# EAGLE board LEDS (EAGLE 6.4)
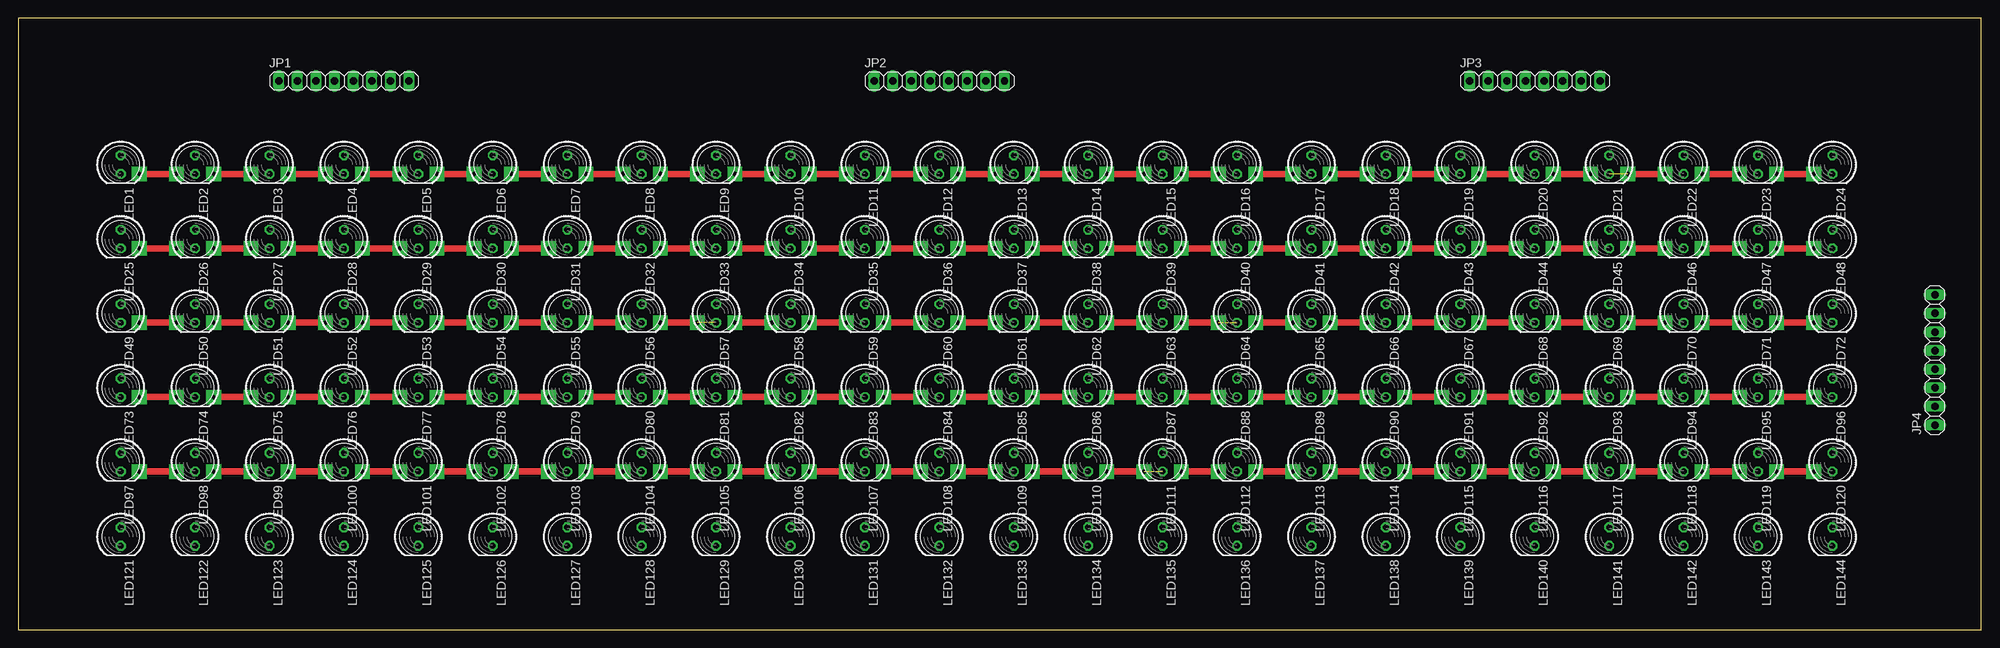
[diagram p0: board, top side]
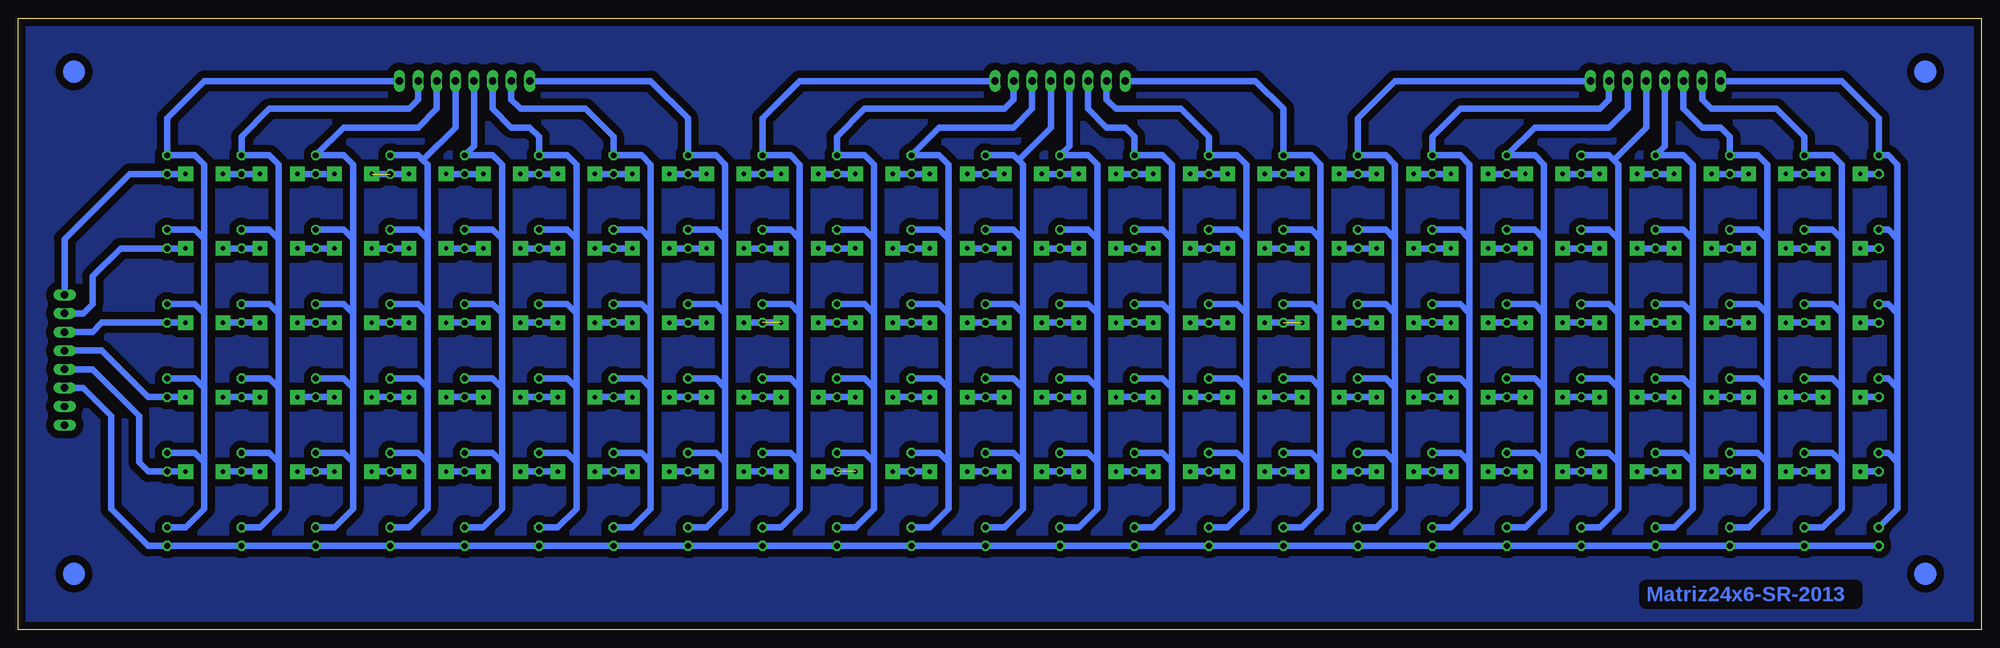
[diagram p1: board, bottom side, seen from below]

Size 267.95 x 83.49 mm. Coordinates in mm from the lower left corner, seen from the top.
Outline: 0,0 267.95,0 267.95,83.49 0,83.49 0,0
Copper layers (1*16): Top 0.035mm / dielectric 1.5mm / Bottom 0.035mm
Design rules "default *": minimum track width 10mil, minimum drill 24mil, track to track 8mil, track to pad 8mil, pad to pad 8mil, via to via 8mil, smd to smd 8mil, copper to edge 40mil, drill to drill 8mil, minimum pad ring 10mil, minimum via ring 8mil, stop-mask expansion 4mil, vias tented up to drill 0mil, thermal gap 10mil

## Footprints (pad centres in the part's own frame; a part is rotated, then mirrored left to right if it is on the bottom)
1X08 = drill 1.016 long: 1 -8.89,0; 2 -6.35,0; 3 -3.81,0; 4 -1.27,0; 5 1.27,0; 6 3.81,0; 7 6.35,0; 8 8.89,0
LED5MM = drill 0.813 octagon: A -1.27,0; K 1.27,0

## Placement (x,y rotation side)
JP1  [1X08]  44.45,74.93 0 top
JP2  [1X08]  125.73,74.93 0 top
JP3  [1X08]  207.01,74.93 0 top
JP4  [1X08]  261.62,36.83 90 top
LED1  [LED5MM]  13.97,63.5 270 top
LED2  [LED5MM]  24.13,63.5 270 top
LED3  [LED5MM]  34.29,63.5 270 top
LED4  [LED5MM]  44.45,63.5 270 top
LED5  [LED5MM]  54.61,63.5 270 top
LED6  [LED5MM]  64.77,63.5 270 top
LED7  [LED5MM]  74.93,63.5 270 top
LED8  [LED5MM]  85.09,63.5 270 top
LED9  [LED5MM]  95.25,63.5 270 top
LED10  [LED5MM]  105.41,63.5 270 top
LED11  [LED5MM]  115.57,63.5 270 top
LED12  [LED5MM]  125.73,63.5 270 top
LED13  [LED5MM]  135.89,63.5 270 top
LED14  [LED5MM]  146.05,63.5 270 top
LED15  [LED5MM]  156.21,63.5 270 top
LED16  [LED5MM]  166.37,63.5 270 top
LED17  [LED5MM]  176.53,63.5 270 top
LED18  [LED5MM]  186.69,63.5 270 top
LED19  [LED5MM]  196.85,63.5 270 top
LED20  [LED5MM]  207.01,63.5 270 top
LED21  [LED5MM]  217.17,63.5 270 top
LED22  [LED5MM]  227.33,63.5 270 top
LED23  [LED5MM]  237.49,63.5 270 top
LED24  [LED5MM]  247.65,63.5 270 top
LED25  [LED5MM]  13.97,53.34 270 top
LED26  [LED5MM]  24.13,53.34 270 top
LED27  [LED5MM]  34.29,53.34 270 top
LED28  [LED5MM]  44.45,53.34 270 top
LED29  [LED5MM]  54.61,53.34 270 top
LED30  [LED5MM]  64.77,53.34 270 top
LED31  [LED5MM]  74.93,53.34 270 top
LED32  [LED5MM]  85.09,53.34 270 top
LED33  [LED5MM]  95.25,53.34 270 top
LED34  [LED5MM]  105.41,53.34 270 top
LED35  [LED5MM]  115.57,53.34 270 top
LED36  [LED5MM]  125.73,53.34 270 top
LED37  [LED5MM]  135.89,53.34 270 top
LED38  [LED5MM]  146.05,53.34 270 top
LED39  [LED5MM]  156.21,53.34 270 top
LED40  [LED5MM]  166.37,53.34 270 top
LED41  [LED5MM]  176.53,53.34 270 top
LED42  [LED5MM]  186.69,53.34 270 top
LED43  [LED5MM]  196.85,53.34 270 top
LED44  [LED5MM]  207.01,53.34 270 top
LED45  [LED5MM]  217.17,53.34 270 top
LED46  [LED5MM]  227.33,53.34 270 top
LED47  [LED5MM]  237.49,53.34 270 top
LED48  [LED5MM]  247.65,53.34 270 top
LED49  [LED5MM]  13.97,43.18 270 top
LED50  [LED5MM]  24.13,43.18 270 top
LED51  [LED5MM]  34.29,43.18 270 top
LED52  [LED5MM]  44.45,43.18 270 top
LED53  [LED5MM]  54.61,43.18 270 top
LED54  [LED5MM]  64.77,43.18 270 top
LED55  [LED5MM]  74.93,43.18 270 top
LED56  [LED5MM]  85.09,43.18 270 top
LED57  [LED5MM]  95.25,43.18 270 top
LED58  [LED5MM]  105.41,43.18 270 top
LED59  [LED5MM]  115.57,43.18 270 top
LED60  [LED5MM]  125.73,43.18 270 top
LED61  [LED5MM]  135.89,43.18 270 top
LED62  [LED5MM]  146.05,43.18 270 top
LED63  [LED5MM]  156.21,43.18 270 top
LED64  [LED5MM]  166.37,43.18 270 top
LED65  [LED5MM]  176.53,43.18 270 top
LED66  [LED5MM]  186.69,43.18 270 top
LED67  [LED5MM]  196.85,43.18 270 top
LED68  [LED5MM]  207.01,43.18 270 top
LED69  [LED5MM]  217.17,43.18 270 top
LED70  [LED5MM]  227.33,43.18 270 top
LED71  [LED5MM]  237.49,43.18 270 top
LED72  [LED5MM]  247.65,43.18 270 top
LED73  [LED5MM]  13.97,33.02 270 top
LED74  [LED5MM]  24.13,33.02 270 top
LED75  [LED5MM]  34.29,33.02 270 top
LED76  [LED5MM]  44.45,33.02 270 top
LED77  [LED5MM]  54.61,33.02 270 top
LED78  [LED5MM]  64.77,33.02 270 top
LED79  [LED5MM]  74.93,33.02 270 top
LED80  [LED5MM]  85.09,33.02 270 top
LED81  [LED5MM]  95.25,33.02 270 top
LED82  [LED5MM]  105.41,33.02 270 top
LED83  [LED5MM]  115.57,33.02 270 top
LED84  [LED5MM]  125.73,33.02 270 top
LED85  [LED5MM]  135.89,33.02 270 top
LED86  [LED5MM]  146.05,33.02 270 top
LED87  [LED5MM]  156.21,33.02 270 top
LED88  [LED5MM]  166.37,33.02 270 top
LED89  [LED5MM]  176.53,33.02 270 top
LED90  [LED5MM]  186.69,33.02 270 top
LED91  [LED5MM]  196.85,33.02 270 top
LED92  [LED5MM]  207.01,33.02 270 top
LED93  [LED5MM]  217.17,33.02 270 top
LED94  [LED5MM]  227.33,33.02 270 top
LED95  [LED5MM]  237.49,33.02 270 top
LED96  [LED5MM]  247.65,33.02 270 top
LED97  [LED5MM]  13.97,22.86 270 top
LED98  [LED5MM]  24.13,22.86 270 top
LED99  [LED5MM]  34.29,22.86 270 top
LED100  [LED5MM]  44.45,22.86 270 top
LED101  [LED5MM]  54.61,22.86 270 top
LED102  [LED5MM]  64.77,22.86 270 top
LED103  [LED5MM]  74.93,22.86 270 top
LED104  [LED5MM]  85.09,22.86 270 top
LED105  [LED5MM]  95.25,22.86 270 top
LED106  [LED5MM]  105.41,22.86 270 top
LED107  [LED5MM]  115.57,22.86 270 top
LED108  [LED5MM]  125.73,22.86 270 top
LED109  [LED5MM]  135.89,22.86 270 top
LED110  [LED5MM]  146.05,22.86 270 top
LED111  [LED5MM]  156.21,22.86 270 top
LED112  [LED5MM]  166.37,22.86 270 top
LED113  [LED5MM]  176.53,22.86 270 top
LED114  [LED5MM]  186.69,22.86 270 top
LED115  [LED5MM]  196.85,22.86 270 top
LED116  [LED5MM]  207.01,22.86 270 top
LED117  [LED5MM]  217.17,22.86 270 top
LED118  [LED5MM]  227.33,22.86 270 top
LED119  [LED5MM]  237.49,22.86 270 top
LED120  [LED5MM]  247.65,22.86 270 top
LED121  [LED5MM]  13.97,12.7 270 top
LED122  [LED5MM]  24.13,12.7 270 top
LED123  [LED5MM]  34.29,12.7 270 top
LED124  [LED5MM]  44.45,12.7 270 top
LED125  [LED5MM]  54.61,12.7 270 top
LED126  [LED5MM]  64.77,12.7 270 top
LED127  [LED5MM]  74.93,12.7 270 top
LED128  [LED5MM]  85.09,12.7 270 top
LED129  [LED5MM]  95.25,12.7 270 top
LED130  [LED5MM]  105.41,12.7 270 top
LED131  [LED5MM]  115.57,12.7 270 top
LED132  [LED5MM]  125.73,12.7 270 top
LED133  [LED5MM]  135.89,12.7 270 top
LED134  [LED5MM]  146.05,12.7 270 top
LED135  [LED5MM]  156.21,12.7 270 top
LED136  [LED5MM]  166.37,12.7 270 top
LED137  [LED5MM]  176.53,12.7 270 top
LED138  [LED5MM]  186.69,12.7 270 top
LED139  [LED5MM]  196.85,12.7 270 top
LED140  [LED5MM]  207.01,12.7 270 top
LED141  [LED5MM]  217.17,12.7 270 top
LED142  [LED5MM]  227.33,12.7 270 top
LED143  [LED5MM]  237.49,12.7 270 top
LED144  [LED5MM]  247.65,12.7 270 top

## Library data of the parts
JP1-JP4 = pinhead
LED1-LED144 = led

## Nets
C1: JP1.1 LED1.A LED25.A LED49.A LED73.A LED97.A LED121.A
C2: JP1.2 LED2.A LED26.A LED50.A LED74.A LED98.A LED122.A
C3: JP1.3 LED3.A LED27.A LED51.A LED75.A LED99.A LED123.A
C4: JP1.4 LED4.A LED28.A LED52.A LED76.A LED100.A LED124.A
C5: JP1.5 LED5.A LED29.A LED53.A LED77.A LED101.A LED125.A
C6: JP1.6 LED6.A LED30.A LED54.A LED78.A LED102.A LED126.A
C7: JP1.7 LED7.A LED31.A LED55.A LED79.A LED103.A LED127.A
C8: JP1.8 LED8.A LED32.A LED56.A LED80.A LED104.A LED128.A
C9: JP2.1 LED9.A LED33.A LED57.A LED81.A LED105.A LED129.A
C10: JP2.2 LED10.A LED34.A LED58.A LED82.A LED106.A LED130.A
C11: JP2.3 LED11.A LED35.A LED59.A LED83.A LED107.A LED131.A
C12: JP2.4 LED12.A LED36.A LED60.A LED84.A LED108.A LED132.A
C13: JP2.5 LED13.A LED37.A LED61.A LED85.A LED109.A LED133.A
C14: JP2.6 LED14.A LED38.A LED62.A LED86.A LED110.A LED134.A
C15: JP2.7 LED15.A LED39.A LED63.A LED87.A LED111.A LED135.A
C16: JP2.8 LED16.A LED40.A LED64.A LED88.A LED112.A LED136.A
C17: JP3.1 LED17.A LED41.A LED65.A LED89.A LED113.A LED137.A
C18: JP3.2 LED18.A LED42.A LED66.A LED90.A LED114.A LED138.A
C19: JP3.3 LED19.A LED43.A LED67.A LED91.A LED115.A LED139.A
C20: JP3.4 LED20.A LED44.A LED68.A LED92.A LED116.A LED140.A
C21: JP3.5 LED21.A LED45.A LED69.A LED93.A LED117.A LED141.A
C22: JP3.6 LED22.A LED46.A LED70.A LED94.A LED118.A LED142.A
C23: JP3.7 LED23.A LED47.A LED71.A LED95.A LED119.A LED143.A
C24: JP3.8 LED24.A LED48.A LED72.A LED96.A LED120.A LED144.A
F1: JP4.8 LED1.K LED2.K LED3.K LED4.K LED5.K LED6.K LED7.K LED8.K LED9.K LED10.K LED11.K LED12.K LED13.K LED14.K LED15.K LED16.K LED17.K LED18.K LED19.K LED20.K LED21.K LED22.K LED23.K LED24.K
F2: JP4.7 LED25.K LED26.K LED27.K LED28.K LED29.K LED30.K LED31.K LED32.K LED33.K LED34.K LED35.K LED36.K LED37.K LED38.K LED39.K LED40.K LED41.K LED42.K LED43.K LED44.K LED45.K LED46.K LED47.K LED48.K
F3: JP4.6 LED49.K LED50.K LED51.K LED52.K LED53.K LED54.K LED55.K LED56.K LED57.K LED58.K LED59.K LED60.K LED61.K LED62.K LED63.K LED64.K LED65.K LED66.K LED67.K LED68.K LED69.K LED70.K LED71.K LED72.K
F4: JP4.5 LED73.K LED74.K LED75.K LED76.K LED77.K LED78.K LED79.K LED80.K LED81.K LED82.K LED83.K LED84.K LED85.K LED86.K LED87.K LED88.K LED89.K LED90.K LED91.K LED92.K LED93.K LED94.K LED95.K LED96.K
F5: JP4.4 LED97.K LED98.K LED99.K LED100.K LED101.K LED102.K LED103.K LED104.K LED105.K LED106.K LED107.K LED108.K LED109.K LED110.K LED111.K LED112.K LED113.K LED114.K LED115.K LED116.K LED117.K LED118.K LED119.K LED120.K
F6: JP4.3 LED121.K LED122.K LED123.K LED124.K LED125.K LED126.K LED127.K LED128.K LED129.K LED130.K LED131.K LED132.K LED133.K LED134.K LED135.K LED136.K LED137.K LED138.K LED139.K LED140.K LED141.K LED142.K LED143.K LED144.K

## Tracks (layer width: path | path; a pad name or v marks a point on that pad's centre or on a via)
C1
  Bottom 0.9: 11.43,53.34 11.43,63.5 12.7,64.77 LED1.A 13.97,69.85 19.05,74.93 JP1.1 | 11.43,53.34 11.43,43.18 | 11.43,43.18 11.43,33.02 | 11.43,33.02 11.43,22.86 | 11.43,22.86 11.43,16.51 LED121.A | LED97.A 12.7,24.13 11.43,22.86 | LED73.A 12.7,34.29 11.43,33.02 | LED49.A 12.7,44.45 11.43,43.18 | LED25.A 12.7,54.61 11.43,53.34
C2
  Bottom 0.9: 19.05,53.34 19.05,63.5 20.32,64.77 LED2.A 24.13,67.31 27.94,71.12 36.83,71.12 38.1,72.39 JP1.2 | 19.05,53.34 19.05,43.18 | 19.05,43.18 19.05,33.02 | 19.05,33.02 19.05,22.86 | 19.05,22.86 19.05,16.51 21.59,13.97 LED122.A | LED26.A 20.32,54.61 19.05,53.34 | LED50.A 20.32,44.45 19.05,43.18 | LED74.A 20.32,34.29 19.05,33.02 | LED98.A 20.32,24.13 19.05,22.86
C3
  Bottom 0.9: 29.21,53.34 29.21,63.5 30.48,64.77 LED3.A 34.29,67.31 35.56,68.58 38.1,68.58 40.64,71.12 JP1.3 | 29.21,53.34 29.21,43.18 | 29.21,43.18 29.21,33.02 | 29.21,33.02 29.21,22.86 | 29.21,22.86 29.21,16.51 31.75,13.97 LED123.A | LED27.A 30.48,54.61 29.21,53.34 | LED51.A 30.48,44.45 29.21,43.18 | LED75.A 30.48,34.29 29.21,33.02 | LED99.A 30.48,24.13 29.21,22.86
C4
  Bottom 0.9: 39.37,53.34 39.37,63.5 40.64,64.77 LED4.A 43.18,66.04 JP1.4 | 39.37,53.34 39.37,43.18 | 39.37,43.18 39.37,33.02 | 39.37,33.02 39.37,22.86 | 39.37,22.86 39.37,16.51 41.91,13.97 LED124.A | LED28.A 40.64,54.61 39.37,53.34 | LED52.A 40.64,44.45 39.37,43.18 | LED76.A 40.64,34.29 39.37,33.02 | LED100.A 40.64,24.13 39.37,22.86
C5
  Bottom 0.9: LED5.A 50.8,64.77 50.16,64.14 | 50.16,64.14 49.53,63.5 49.53,53.34 | 49.53,53.34 49.53,43.18 | 49.53,43.18 49.53,33.02 | 49.53,33.02 49.53,22.86 | 49.53,22.86 49.53,16.51 52.07,13.97 LED125.A | LED29.A 50.8,54.61 49.53,53.34 | LED53.A 50.8,44.45 49.53,43.18 | LED77.A 50.8,34.29 49.53,33.02 | LED101.A 50.8,24.13 49.53,22.86 | JP1.5 45.72,68.58 50.16,64.14
C6
  Bottom 0.9: 59.69,53.34 59.69,63.5 60.96,64.77 LED6.A 60.96,68.58 50.8,68.58 48.26,71.12 JP1.6 | 59.69,53.34 59.69,43.18 | 59.69,43.18 59.69,33.02 | 59.69,33.02 59.69,22.86 | 59.69,22.86 59.69,16.51 62.23,13.97 LED126.A | LED30.A 60.96,54.61 59.69,53.34 | LED54.A 60.96,44.45 59.69,43.18 | LED78.A 60.96,34.29 59.69,33.02 | LED102.A 60.96,24.13 59.69,22.86
C7
  Bottom 0.9: 69.85,53.34 69.85,63.5 71.12,64.77 LED7.A 74.93,67.31 71.12,71.12 52.07,71.12 50.8,72.39 JP1.7 | 69.85,53.34 69.85,43.18 | 69.85,43.18 69.85,33.02 | 69.85,33.02 69.85,22.86 | 69.85,22.86 69.85,16.51 72.39,13.97 LED127.A | LED103.A 71.12,24.13 69.85,22.86 | LED79.A 71.12,34.29 69.85,33.02 | LED55.A 71.12,44.45 69.85,43.18 | LED31.A 71.12,54.61 69.85,53.34
C8
  Bottom 0.9: 80.01,53.34 80.01,63.5 81.28,64.77 LED8.A 85.09,69.85 80.01,74.93 JP1.8 | 80.01,53.34 80.01,43.18 | 80.01,43.18 80.01,33.02 | 80.01,33.02 80.01,22.86 | 80.01,22.86 80.01,16.51 82.55,13.97 LED128.A | LED104.A 81.28,24.13 80.01,22.86 | LED80.A 81.28,34.29 80.01,33.02 | LED56.A 81.28,44.45 80.01,43.18 | LED32.A 81.28,54.61 80.01,53.34
C9
  Bottom 0.9: 90.17,53.34 90.17,63.5 91.44,64.77 LED9.A 95.25,71.12 99.06,74.93 JP2.1 | 90.17,53.34 90.17,43.18 | 90.17,43.18 90.17,33.02 | 90.17,33.02 90.17,22.86 | 90.17,22.86 90.17,16.51 92.71,13.97 LED129.A | LED105.A 91.44,24.13 90.17,22.86 | LED81.A 91.44,34.29 90.17,33.02 | LED57.A 91.44,44.45 90.17,43.18 | LED33.A 91.44,54.61 90.17,53.34
C10
  Bottom 0.9: 100.33,53.34 100.33,63.5 101.6,64.77 LED10.A 105.41,67.31 109.22,71.12 118.11,71.12 119.38,72.39 JP2.2 | 100.33,53.34 100.33,43.18 | 100.33,43.18 100.33,33.02 | 100.33,33.02 100.33,22.86 | 100.33,22.86 100.33,16.51 102.87,13.97 LED130.A | LED106.A 101.6,24.13 100.33,22.86 | LED82.A 101.6,34.29 100.33,33.02 | LED58.A 101.6,44.45 100.33,43.18 | LED34.A 101.6,54.61 100.33,53.34
C11
  Bottom 0.9: 110.49,53.34 110.49,63.5 111.76,64.77 LED11.A 115.57,67.31 116.84,68.58 119.38,68.58 121.92,71.12 JP2.3 | 110.49,53.34 110.49,43.18 | 110.49,43.18 110.49,33.02 | 110.49,33.02 110.49,22.86 | 110.49,22.86 110.49,16.51 113.03,13.97 LED131.A | LED107.A 111.76,24.13 110.49,22.86 | LED83.A 111.76,34.29 110.49,33.02 | LED59.A 111.76,44.45 110.49,43.18 | LED35.A 111.76,54.61 110.49,53.34
C12
  Bottom 0.9: 120.65,53.34 120.65,63.5 121.92,64.77 LED12.A 124.46,66.04 JP2.4 | 120.65,53.34 120.65,43.18 | 120.65,43.18 120.65,33.02 | 120.65,33.02 120.65,22.86 | 120.65,22.86 120.65,16.51 123.19,13.97 LED132.A | LED108.A 121.92,24.13 120.65,22.86 | LED84.A 121.92,34.29 120.65,33.02 | LED60.A 121.92,44.45 120.65,43.18 | LED36.A 121.92,54.61 120.65,53.34
C13
  Bottom 0.9: LED13.A 132.08,64.77 131.44,64.14 | 131.44,64.14 130.81,63.5 130.81,53.34 | 130.81,53.34 130.81,43.18 | 130.81,43.18 130.81,33.02 | 130.81,33.02 130.81,22.86 | 130.81,22.86 130.81,16.51 133.35,13.97 LED133.A | LED109.A 132.08,24.13 130.81,22.86 | LED85.A 132.08,34.29 130.81,33.02 | LED61.A 132.08,44.45 130.81,43.18 | LED37.A 132.08,54.61 130.81,53.34 | JP2.5 127,68.58 131.44,64.14
C14
  Bottom 0.9: 140.97,53.34 140.97,63.5 142.24,64.77 LED14.A 142.24,68.58 132.08,68.58 129.54,71.12 JP2.6 | 140.97,53.34 140.97,43.18 | 140.97,43.18 140.97,33.02 | 140.97,33.02 140.97,22.86 | 140.97,22.86 140.97,16.51 143.51,13.97 LED134.A | LED110.A 142.24,24.13 140.97,22.86 | LED86.A 142.24,34.29 140.97,33.02 | LED62.A 142.24,44.45 140.97,43.18 | LED38.A 142.24,54.61 140.97,53.34
C15
  Bottom 0.9: LED135.A 153.67,13.97 151.13,16.51 151.13,22.86 | 151.13,22.86 151.13,33.02 | 151.13,33.02 151.13,43.18 | 151.13,43.18 151.13,53.34 | 151.13,53.34 151.13,63.5 152.4,64.77 LED15.A 156.21,67.31 152.4,71.12 133.35,71.12 132.08,72.39 JP2.7 | LED111.A 152.4,24.13 151.13,22.86 | LED87.A 152.4,34.29 151.13,33.02 | LED63.A 152.4,44.45 151.13,43.18 | LED39.A 152.4,54.61 151.13,53.34
C16
  Bottom 0.9: 161.29,53.34 161.29,63.5 162.56,64.77 LED16.A 166.37,69.85 161.29,74.93 JP2.8 | 161.29,53.34 161.29,43.18 | 161.29,43.18 161.29,33.02 | 161.29,33.02 161.29,22.86 | 161.29,22.86 161.29,16.51 163.83,13.97 LED136.A | LED112.A 162.56,24.13 161.29,22.86 | LED88.A 162.56,34.29 161.29,33.02 | LED64.A 162.56,44.45 161.29,43.18 | LED40.A 162.56,54.61 161.29,53.34
C17
  Bottom 0.9: 171.45,53.34 171.45,63.5 172.72,64.77 LED17.A 176.53,69.85 181.61,74.93 JP3.1 | 171.45,53.34 171.45,43.18 | 171.45,43.18 171.45,33.02 | 171.45,33.02 171.45,22.86 | 171.45,22.86 171.45,16.51 173.99,13.97 LED137.A | LED41.A 172.72,54.61 171.45,53.34 | LED65.A 172.72,44.45 171.45,43.18 | LED89.A 172.72,34.29 171.45,33.02 | LED113.A 172.72,24.13 171.45,22.86
C18
  Bottom 0.9: 181.61,53.34 181.61,63.5 182.88,64.77 LED18.A 186.69,67.31 190.5,71.12 199.39,71.12 200.66,72.39 JP3.2 | 181.61,53.34 181.61,43.18 | 181.61,43.18 181.61,33.02 | 181.61,33.02 181.61,22.86 | 181.61,22.86 181.61,16.51 184.15,13.97 LED138.A | LED114.A 182.88,24.13 181.61,22.86 | LED90.A 182.88,34.29 181.61,33.02 | LED66.A 182.88,44.45 181.61,43.18 | LED42.A 182.88,54.61 181.61,53.34
C19
  Bottom 0.9: 191.77,53.34 191.77,63.5 193.04,64.77 LED19.A 196.85,67.31 198.12,68.58 200.66,68.58 203.2,71.12 JP3.3 | 191.77,53.34 191.77,43.18 | 191.77,43.18 191.77,33.02 | 191.77,33.02 191.77,22.86 | 191.77,22.86 191.77,16.51 194.31,13.97 LED139.A | LED43.A 193.04,54.61 191.77,53.34 | LED67.A 193.04,44.45 191.77,43.18 | LED91.A 193.04,34.29 191.77,33.02 | LED115.A 193.04,24.13 191.77,22.86
C20
  Bottom 0.9: 201.93,53.34 201.93,63.5 203.2,64.77 LED20.A 205.74,66.04 JP3.4 | 201.93,53.34 201.93,43.18 | 201.93,43.18 201.93,33.02 | 201.93,33.02 201.93,22.86 | 201.93,22.86 201.93,16.51 204.47,13.97 LED140.A | LED116.A 203.2,24.13 201.93,22.86 | LED92.A 203.2,34.29 201.93,33.02 | LED68.A 203.2,44.45 201.93,43.18 | LED44.A 203.2,54.61 201.93,53.34
C21
  Bottom 0.9: LED21.A 213.36,64.77 212.72,64.14 | 212.72,64.14 212.09,63.5 212.09,53.34 | 212.09,53.34 212.09,43.18 | 212.09,43.18 212.09,33.02 | 212.09,33.02 212.09,22.86 | 212.09,22.86 212.09,16.51 214.63,13.97 LED141.A | LED45.A 213.36,54.61 212.09,53.34 | LED69.A 213.36,44.45 212.09,43.18 | LED93.A 213.36,34.29 212.09,33.02 | LED117.A 213.36,24.13 212.09,22.86 | JP3.5 208.28,68.58 212.72,64.14
C22
  Bottom 0.9: 222.25,53.34 222.25,63.5 223.52,64.77 LED22.A 223.52,68.58 213.36,68.58 210.82,71.12 JP3.6 | 222.25,53.34 222.25,43.18 | 222.25,43.18 222.25,33.02 | 222.25,33.02 222.25,22.86 | 222.25,22.86 222.25,16.51 224.79,13.97 LED142.A | LED118.A 223.52,24.13 222.25,22.86 | LED94.A 223.52,34.29 222.25,33.02 | LED70.A 223.52,44.45 222.25,43.18 | LED46.A 223.52,54.61 222.25,53.34
C23
  Bottom 0.9: 232.41,53.34 232.41,63.5 233.68,64.77 LED23.A 237.49,67.31 233.68,71.12 214.63,71.12 213.36,72.39 JP3.7 | 232.41,53.34 232.41,43.18 | 232.41,43.18 232.41,33.02 | 232.41,33.02 232.41,22.86 | 232.41,22.86 232.41,16.51 234.95,13.97 LED143.A | LED47.A 233.68,54.61 232.41,53.34 | LED71.A 233.68,44.45 232.41,43.18 | LED95.A 233.68,34.29 232.41,33.02 | LED119.A 233.68,24.13 232.41,22.86
C24
  Bottom 0.9: 242.57,53.34 242.57,63.5 243.84,64.77 LED24.A 247.65,69.85 242.57,74.93 JP3.8 | 242.57,53.34 242.57,43.18 | 242.57,43.18 242.57,33.02 | 242.57,33.02 242.57,22.86 | 242.57,22.86 242.57,16.51 245.11,13.97 LED144.A | LED48.A 243.84,54.61 242.57,53.34 | LED72.A 243.84,44.45 242.57,43.18 | LED96.A 243.84,34.29 242.57,33.02 | LED120.A 243.84,24.13 242.57,22.86
F1  (via drill 0.6 pad 2)  (1 unrouted)
  Top 0.9: v16.51,62.23 v21.59,62.23 | v26.67,62.23 v31.75,62.23 | v36.83,62.23 v41.91,62.23 | v46.99,62.23 v52.07,62.23 | v57.15,62.23 v62.23,62.23 | v67.31,62.23 v72.39,62.23 | v77.47,62.23 v82.55,62.23 | v87.63,62.23 v92.71,62.23 | v97.79,62.23 v102.87,62.23 | v107.95,62.23 v113.03,62.23 | v118.11,62.23 v123.19,62.23 | v128.27,62.23 v133.35,62.23 | v138.43,62.23 v143.51,62.23 | v148.59,62.23 v153.67,62.23 | v158.75,62.23 v163.83,62.23 | v168.91,62.23 v173.99,62.23 | v179.07,62.23 v184.15,62.23 | v189.23,62.23 v194.31,62.23 | v199.39,62.23 v204.47,62.23 | v209.55,62.23 v214.63,62.23 | v219.71,62.23 v224.79,62.23 | v229.87,62.23 v234.95,62.23 | v240.03,62.23 v245.11,62.23
  Bottom 0.9: LED1.K v16.51,62.23 | v21.59,62.23 LED2.K v26.67,62.23 | v31.75,62.23 LED3.K v36.83,62.23 | v41.91,62.23 LED4.K v46.99,62.23 | v52.07,62.23 LED5.K v57.15,62.23 | v62.23,62.23 LED6.K v67.31,62.23 | v72.39,62.23 LED7.K v77.47,62.23 | v82.55,62.23 LED8.K v87.63,62.23 | v92.71,62.23 LED9.K v97.79,62.23 | v102.87,62.23 LED10.K v107.95,62.23 | v113.03,62.23 LED11.K v118.11,62.23 | v123.19,62.23 LED12.K v128.27,62.23 | v133.35,62.23 LED13.K v138.43,62.23 | v143.51,62.23 LED14.K v148.59,62.23 | v153.67,62.23 LED15.K v158.75,62.23 | v163.83,62.23 LED16.K v168.91,62.23 | v173.99,62.23 LED17.K v179.07,62.23 | v184.15,62.23 LED18.K v189.23,62.23 | v194.31,62.23 LED19.K v199.39,62.23 | v204.47,62.23 LED20.K v209.55,62.23 | v214.63,62.23 v219.71,62.23 | v224.79,62.23 LED22.K v229.87,62.23 | v234.95,62.23 LED23.K v240.03,62.23 | v245.11,62.23 LED24.K 252.73,62.23 261.62,53.34 JP4.8
F2  (via drill 0.6 pad 2)
  Top 0.9: v16.51,52.07 v21.59,52.07 | v26.67,52.07 v31.75,52.07 | v36.83,52.07 v41.91,52.07 | v46.99,52.07 v52.07,52.07 | v57.15,52.07 v62.23,52.07 | v67.31,52.07 v72.39,52.07 | v77.47,52.07 v82.55,52.07 | v87.63,52.07 v92.71,52.07 | v97.79,52.07 v102.87,52.07 | v107.95,52.07 v113.03,52.07 | v118.11,52.07 v123.19,52.07 | v128.27,52.07 v133.35,52.07 | v138.43,52.07 v143.51,52.07 | v148.59,52.07 v153.67,52.07 | v158.75,52.07 v163.83,52.07 | v168.91,52.07 v173.99,52.07 | v179.07,52.07 v184.15,52.07 | v189.23,52.07 v194.31,52.07 | v199.39,52.07 v204.47,52.07 | v209.55,52.07 v214.63,52.07 | v219.71,52.07 v224.79,52.07 | v229.87,52.07 v234.95,52.07 | v240.03,52.07 v245.11,52.07
  Bottom 0.9: LED25.K v16.51,52.07 | v21.59,52.07 LED26.K v26.67,52.07 | v31.75,52.07 LED27.K v36.83,52.07 | v41.91,52.07 LED28.K v46.99,52.07 | v52.07,52.07 LED29.K v57.15,52.07 | v62.23,52.07 LED30.K v67.31,52.07 | v72.39,52.07 LED31.K v77.47,52.07 | v82.55,52.07 LED32.K v87.63,52.07 | v92.71,52.07 LED33.K v97.79,52.07 | v102.87,52.07 LED34.K v107.95,52.07 | v113.03,52.07 LED35.K v118.11,52.07 | v123.19,52.07 LED36.K v128.27,52.07 | v133.35,52.07 LED37.K v138.43,52.07 | v143.51,52.07 LED38.K v148.59,52.07 | v153.67,52.07 LED39.K v158.75,52.07 | v163.83,52.07 LED40.K v168.91,52.07 | v173.99,52.07 LED41.K v179.07,52.07 | v184.15,52.07 LED42.K v189.23,52.07 | v194.31,52.07 LED43.K v199.39,52.07 | v204.47,52.07 LED44.K v209.55,52.07 | v214.63,52.07 LED45.K v219.71,52.07 | v224.79,52.07 LED46.K v229.87,52.07 | v234.95,52.07 LED47.K v240.03,52.07 | v245.11,52.07 LED48.K 254,52.07 257.81,48.26 257.81,44.45 259.08,43.18 JP4.7
F3  (via drill 0.6 pad 2)  (2 unrouted)
  Top 0.9: v16.51,41.91 v21.59,41.91 | v26.67,41.91 v31.75,41.91 | v36.83,41.91 v41.91,41.91 | v46.99,41.91 v52.07,41.91 | v57.15,41.91 v62.23,41.91 | v67.31,41.91 v72.39,41.91 | v77.47,41.91 v82.55,41.91 | v87.63,41.91 v92.71,41.91 | v97.79,41.91 v102.87,41.91 | v107.95,41.91 v113.03,41.91 | v118.11,41.91 v123.19,41.91 | v128.27,41.91 v133.35,41.91 | v138.43,41.91 v143.51,41.91 | v148.59,41.91 v153.67,41.91 | v158.75,41.91 v163.83,41.91 | v168.91,41.91 v173.99,41.91 | v179.07,41.91 v184.15,41.91 | v189.23,41.91 v194.31,41.91 | v199.39,41.91 v204.47,41.91 | v209.55,41.91 v214.63,41.91 | v219.71,41.91 v224.79,41.91 | v229.87,41.91 v234.95,41.91 | v240.03,41.91 v245.11,41.91
  Bottom 0.9: LED49.K v16.51,41.91 | v21.59,41.91 LED50.K v26.67,41.91 | v31.75,41.91 LED51.K v36.83,41.91 | v41.91,41.91 LED52.K v46.99,41.91 | v52.07,41.91 LED53.K v57.15,41.91 | v62.23,41.91 LED54.K v67.31,41.91 | v72.39,41.91 LED55.K v77.47,41.91 | v82.55,41.91 LED56.K v87.63,41.91 | v92.71,41.91 v97.79,41.91 | v102.87,41.91 LED58.K v107.95,41.91 | v113.03,41.91 LED59.K v118.11,41.91 | v123.19,41.91 LED60.K v128.27,41.91 | v133.35,41.91 LED61.K v138.43,41.91 | v143.51,41.91 LED62.K v148.59,41.91 | v153.67,41.91 LED63.K v158.75,41.91 | v163.83,41.91 v168.91,41.91 | v173.99,41.91 LED65.K v179.07,41.91 | v184.15,41.91 LED66.K v189.23,41.91 | v194.31,41.91 LED67.K v199.39,41.91 | v204.47,41.91 LED68.K v209.55,41.91 | v214.63,41.91 LED69.K v219.71,41.91 | v224.79,41.91 LED70.K v229.87,41.91 | v234.95,41.91 LED71.K v240.03,41.91 | v245.11,41.91 LED72.K 256.54,41.91 257.81,40.64 JP4.6
F4  (via drill 0.6 pad 2)
  Top 0.9: v16.51,31.75 v21.59,31.75 | v26.67,31.75 v31.75,31.75 | v36.83,31.75 v41.91,31.75 | v46.99,31.75 v52.07,31.75 | v57.15,31.75 v62.23,31.75 | v67.31,31.75 v72.39,31.75 | v77.47,31.75 v82.55,31.75 | v87.63,31.75 v92.71,31.75 | v97.79,31.75 v102.87,31.75 | v107.95,31.75 v113.03,31.75 | v118.11,31.75 v123.19,31.75 | v128.27,31.75 v133.35,31.75 | v138.43,31.75 v143.51,31.75 | v148.59,31.75 v153.67,31.75 | v158.75,31.75 v163.83,31.75 | v168.91,31.75 v173.99,31.75 | v179.07,31.75 v184.15,31.75 | v189.23,31.75 v194.31,31.75 | v199.39,31.75 v204.47,31.75 | v209.55,31.75 v214.63,31.75 | v219.71,31.75 v224.79,31.75 | v229.87,31.75 v234.95,31.75 | v240.03,31.75 v245.11,31.75
  Bottom 0.9: LED73.K v16.51,31.75 | v21.59,31.75 LED74.K v26.67,31.75 | v31.75,31.75 LED75.K v36.83,31.75 | v41.91,31.75 LED76.K v46.99,31.75 | v52.07,31.75 LED77.K v57.15,31.75 | v62.23,31.75 LED78.K v67.31,31.75 | v72.39,31.75 LED79.K v77.47,31.75 | v82.55,31.75 LED80.K v87.63,31.75 | v92.71,31.75 LED81.K v97.79,31.75 | v102.87,31.75 LED82.K v107.95,31.75 | v113.03,31.75 LED83.K v118.11,31.75 | v123.19,31.75 LED84.K v128.27,31.75 | v133.35,31.75 LED85.K v138.43,31.75 | v143.51,31.75 LED86.K v148.59,31.75 | v153.67,31.75 LED87.K v158.75,31.75 | v163.83,31.75 LED88.K v168.91,31.75 | v173.99,31.75 LED89.K v179.07,31.75 | v184.15,31.75 LED90.K v189.23,31.75 | v194.31,31.75 LED91.K v199.39,31.75 | v204.47,31.75 LED92.K v209.55,31.75 | v214.63,31.75 LED93.K v219.71,31.75 | v224.79,31.75 LED94.K v229.87,31.75 | v234.95,31.75 LED95.K v240.03,31.75 | v245.11,31.75 LED96.K 250.19,31.75 256.54,38.1 JP4.5
F5  (via drill 0.6 pad 2)  (1 unrouted)
  Top 0.9: v16.51,21.59 v21.59,21.59 | v26.67,21.59 v31.75,21.59 | v36.83,21.59 v41.91,21.59 | v46.99,21.59 v52.07,21.59 | v57.15,21.59 v62.23,21.59 | v67.31,21.59 v72.39,21.59 | v77.47,21.59 v82.55,21.59 | v87.63,21.59 v92.71,21.59 | v118.11,21.59 v123.19,21.59 | v107.95,21.59 v113.03,21.59 | v97.79,21.59 v102.87,21.59 | v128.27,21.59 v133.35,21.59 | v138.43,21.59 v143.51,21.59 | v148.59,21.59 v153.67,21.59 | v158.75,21.59 v163.83,21.59 | v168.91,21.59 v173.99,21.59 | v179.07,21.59 v184.15,21.59 | v189.23,21.59 v194.31,21.59 | v199.39,21.59 v204.47,21.59 | v209.55,21.59 v214.63,21.59 | v219.71,21.59 v224.79,21.59 | v229.87,21.59 v234.95,21.59 | v240.03,21.59 v245.11,21.59
  Bottom 0.9: LED97.K v16.51,21.59 | v21.59,21.59 LED98.K v26.67,21.59 | v31.75,21.59 LED99.K v36.83,21.59 | v41.91,21.59 LED100.K v46.99,21.59 | v52.07,21.59 LED101.K v57.15,21.59 | v62.23,21.59 LED102.K v67.31,21.59 | v72.39,21.59 LED103.K v77.47,21.59 | v82.55,21.59 LED104.K v87.63,21.59 | v92.71,21.59 LED105.K v97.79,21.59 | v118.11,21.59 LED107.K v113.03,21.59 | v123.19,21.59 LED108.K v128.27,21.59 | v107.95,21.59 LED106.K v102.87,21.59 | v133.35,21.59 LED109.K v138.43,21.59 | v143.51,21.59 LED110.K v148.59,21.59 | v153.67,21.59 v158.75,21.59 | v163.83,21.59 LED112.K v168.91,21.59 | v173.99,21.59 LED113.K v179.07,21.59 | v184.15,21.59 LED114.K v189.23,21.59 | v194.31,21.59 LED115.K v199.39,21.59 | v204.47,21.59 LED116.K v209.55,21.59 | v214.63,21.59 LED117.K v219.71,21.59 | v224.79,21.59 LED118.K v229.87,21.59 | v234.95,21.59 LED119.K v240.03,21.59 | v245.11,21.59 LED120.K 250.19,21.59 251.46,22.86 251.46,29.21 257.81,35.56 JP4.4
F6
  Bottom 0.9: LED121.K LED122.K LED123.K LED124.K LED125.K LED126.K LED127.K LED128.K LED129.K LED130.K LED131.K LED132.K LED133.K LED134.K LED135.K LED136.K LED137.K LED138.K LED139.K LED140.K LED141.K LED142.K LED143.K LED144.K 250.19,11.43 255.27,16.51 255.27,29.21 259.08,33.02 JP4.3
N$1
  pour Bottom (isolate 1): 0,83.82 267.97,83.82 267.97,0 0,0
(copper drawn outside any net)
  shapes: Bottom circle x4

## Text on the board
Bottom: Matriz24x6-SR-2013